# Altium PCB SuperFin Baseboard #1.PcbDoc
Units mm, origin at the board's own origin, x right, y up, seen from the top; angles counter-clockwise.
Board outline 135 x 84 mm, 3 copper layers (Top Layer, Mid-Layer 1, Bottom Layer); 14 components, 0 nets, 572 pads, 0 vias.
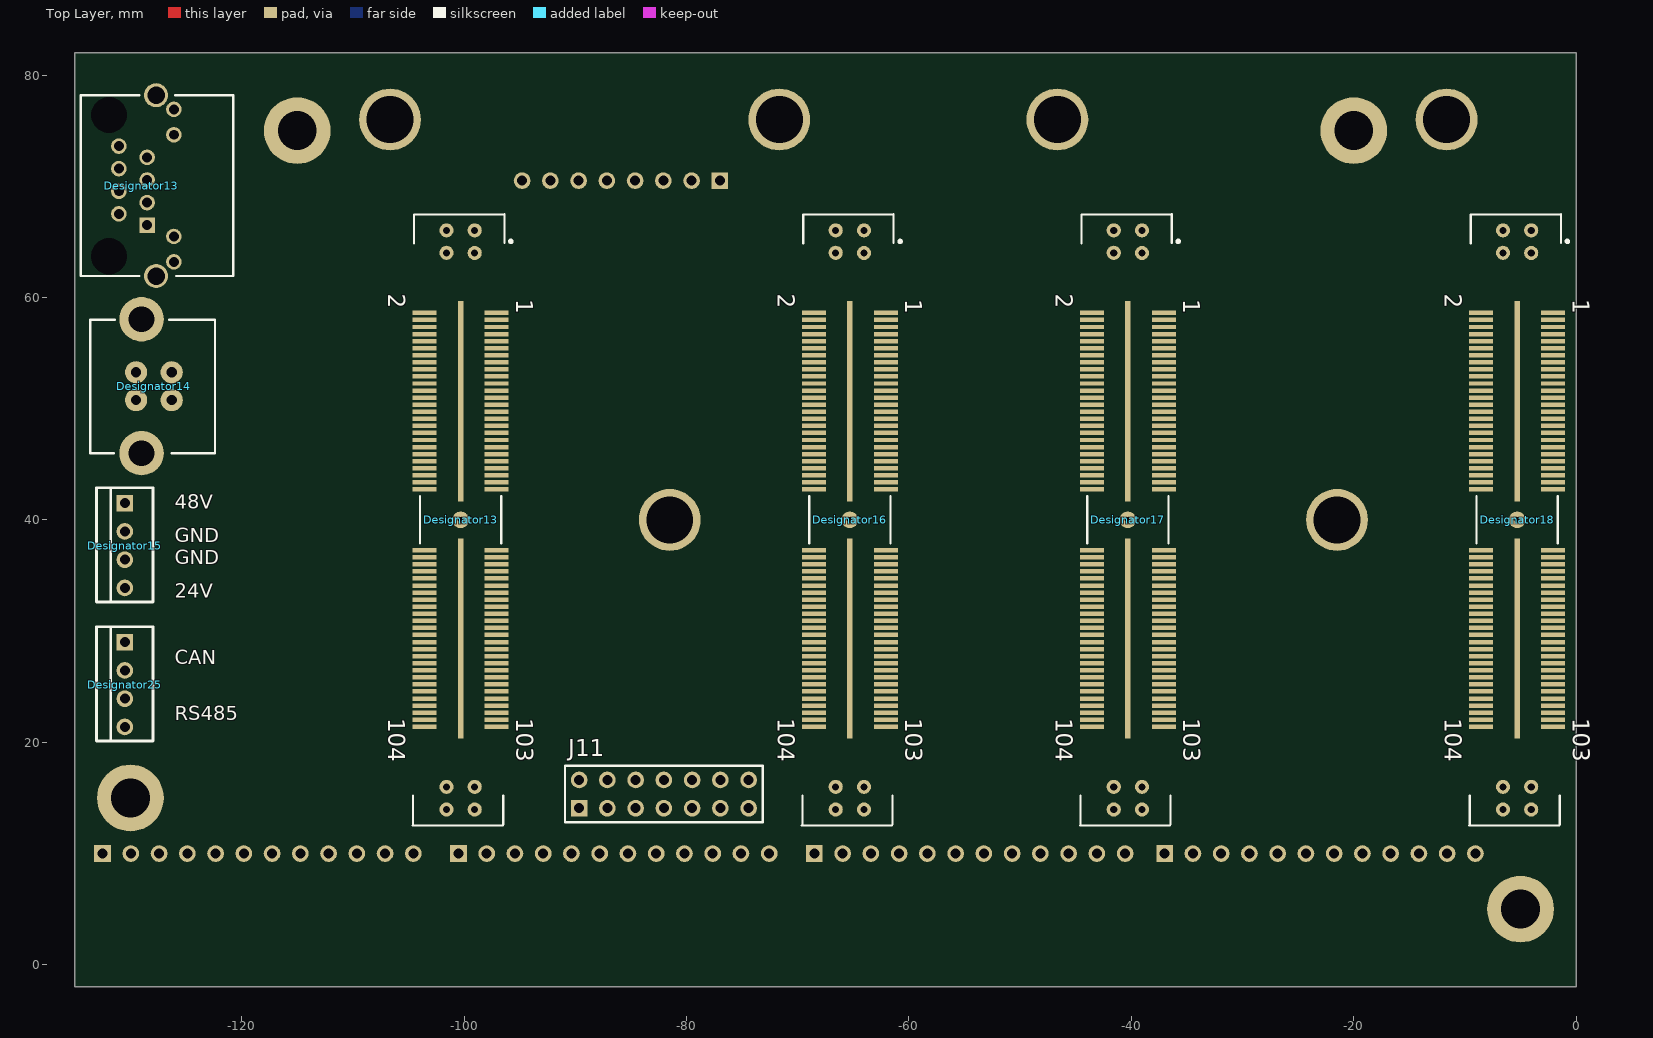
[diagram p0: Top Layer view]
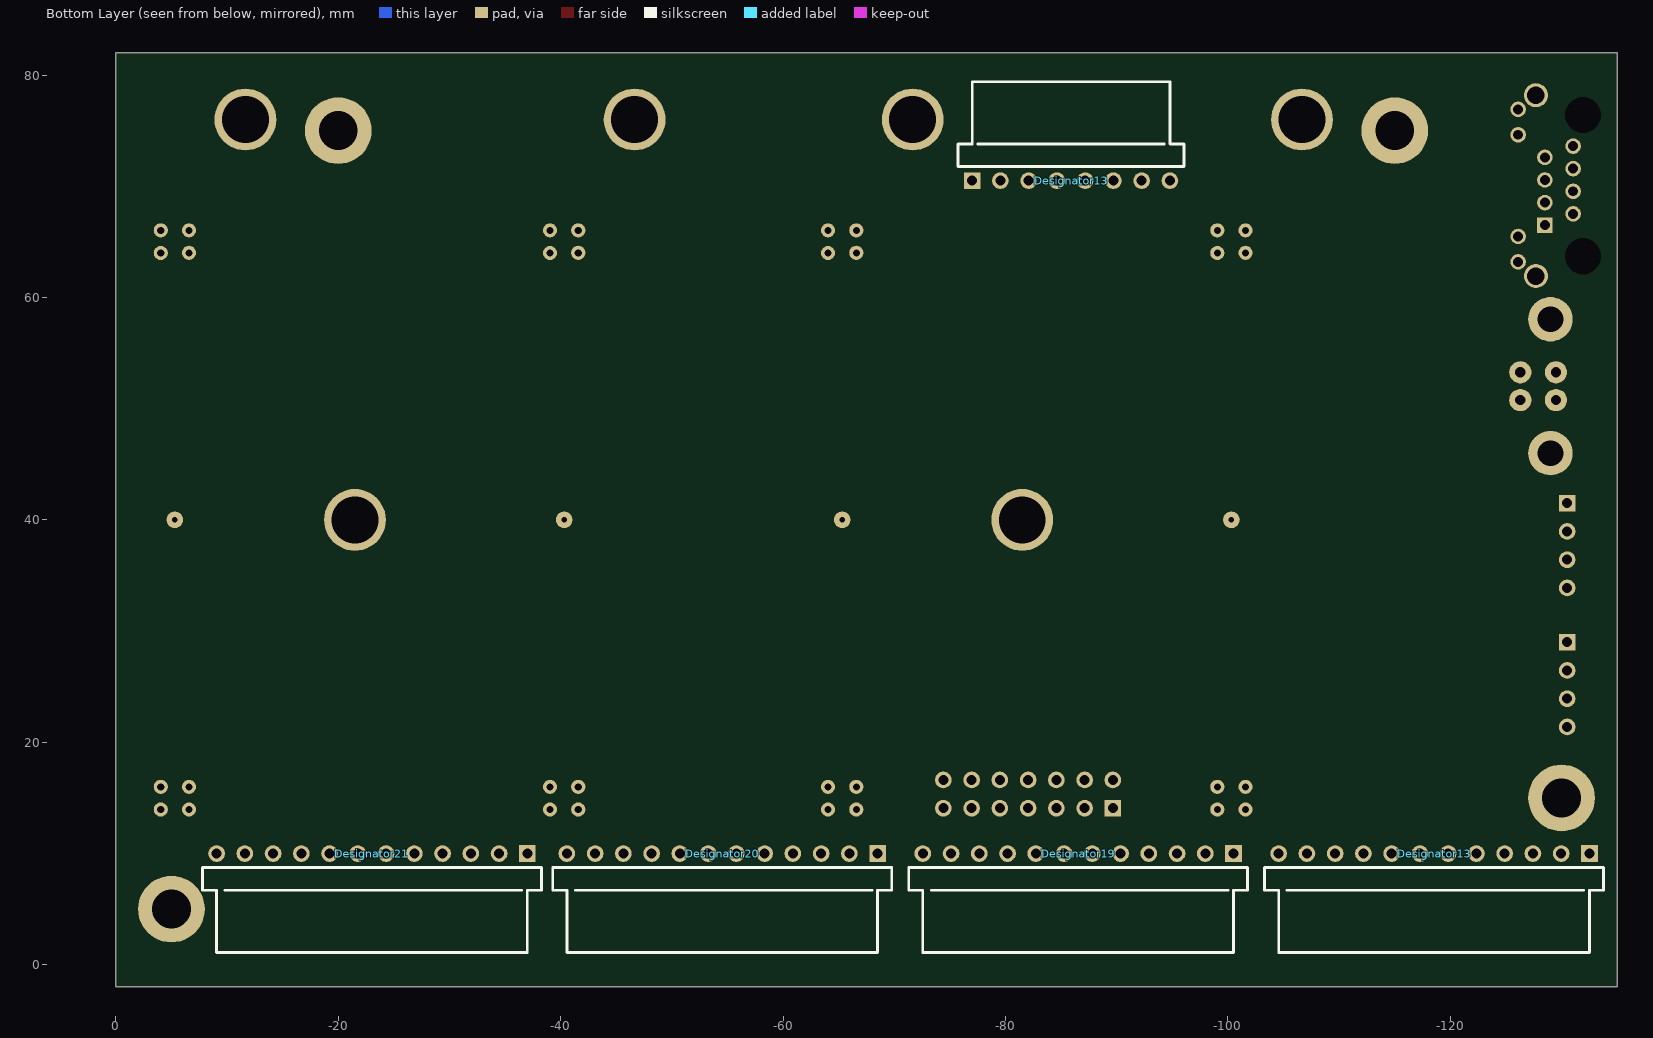
[diagram p1: Bottom Layer view, seen from below]

## Layer stack, top to bottom
Top Layer: signal copper 0.0356
Dielectric: dielectric 0.32, FR-4, Dk 4.8
Mid-Layer 1: signal copper 0.0356
Dielectric: dielectric 0.32, FR-4, Dk 4.8
Bottom Layer: signal copper 0.0356

## Board outline
-135,-2 0,-2 0,82 -135,82

## Design rules (kind name [scope] priority, off if disabled: settings)
Clearance [All] p1: gap=0.254
PolygonConnect [All] p1: connectstyle=Relief reliefconductorwidth=0.254 reliefentries=4 polygonreliefangle="90 Angle"
RoutingVias [All] p1: holewidth=0.711 width=1.27 viastyle="Through Hole" minholewidth=0.711 minwidth=1.27 maxholewidth=0.711 maxwidth=1.27
SilkscreenOverComponentPads [All] p1: minsilkscreentomaskgap=0.254
SolderMaskExpansion [All] p1: expansion=0.102
Width [All] p1: maxlimit=0.254 minlimit=0.254 preferedwidth=0.254
27 further rules are at their usual default settings.

## Components (designator, comment, footprint, x,y, rotation, side; value= is the part's Value field where it differs from the comment)
Designator13 "Comment" "HDR 1x12 RT for IDC" -132.5,10 r0 bottom
Designator13 "Comment" "RJ45, VERT MOUNT, NO MAGNETICS" -128.5,66.5 r270 top
Designator13 "Comment" "QFS SMD PWR PINS - 104 pins" -100.31,40 r270 top
Designator13 "Comment" "HDR1X8 RT for IDC" -77,70.5 r180 bottom
Designator14 "Comment" "USB Vertical PCB" -129,46 r270 top
Designator15 "Comment" "HDR1X4 for IDC" -130.5,41.5 r270 top
Designator16 "Comment" "QFS SMD PWR PINS - 104 pins" -65.31,40 r270 top
Designator17 "Comment" "QFS SMD PWR PINS - 104 pins" -40.31,40 r270 top
Designator18 "Comment" "QFS SMD PWR PINS - 104 pins" -5.31,40 r270 top
Designator19 "Comment" "HDR 1x12 RT for IDC" -100.5,10 r0 bottom
Designator20 "Comment" "HDR 1x12 RT for IDC" -68.5,10 r0 bottom
Designator21 "Comment" "HDR 1x12 RT for IDC" -37,10 r0 bottom
Designator25 "Comment" "HDR1X4 for IDC" -130.5,29 r270 top
J11 "Comment" HDR2X7 -89.65,14.075 r0 top

## Footprints (in the part's own frame and the unit in brackets; to place one, negate y for a bottom-side part, rotate by r counter-clockwise, add the part's x,y. Pads: shape width x height; smd on the part's side, far side on the other; paste and mask are expansions set on the pad)
"HDR1X4 for IDC" [mm] "Connector; Header; 4 Position"
  rect 1.5x1.5 hole 0.9: 1(0,0)
  round 1.5 hole 0.9: 2(2.54,0) 3(5.08,0) 4(7.62,0)
  silkscreen extent -1.4,-2.54 8.89,2.54
"HDR1X8 RT for IDC" [mm] "Connector; Header; 8 Position, RT Angle"
  rect 1.5x1.5 hole 0.9: 1(0,0)
  round 1.5 hole 0.9: 2(2.54,0) 3(5.08,0) 4(7.62,0) 5(10.16,0) 6(12.7,0) 7(15.24,0) 8(17.78,0)
  silkscreen extent -1.27,1.27 19.05,8.89
HDR2X7 [mm] "Connector; Header; 7x2 Position"
  rect 1.5x1.5 hole 0.9: 1(0,0)
  round 1.5 hole 0.9: 2(0,2.54) 3(2.54,0) 4(2.54,2.54) 5(5.08,0) 6(5.08,2.54) 7(7.62,0) 8(7.62,2.54) 9(10.16,0) 10(10.16,2.54) 11(12.7,0) 12(12.7,2.54) 13(15.24,0) 14(15.24,2.54)
  silkscreen extent -1.27,-1.27 16.51,3.81
"HDR 1x12 RT for IDC" [mm]
  rect 1.5x1.5 hole 0.9: 1(0,0)
  round 1.5 hole 0.9: 2(2.54,0) 3(5.08,0) 4(7.62,0) 5(10.16,0) 6(12.7,0) 7(15.24,0) 8(17.78,0) 9(20.32,0) 10(22.86,0) 11(25.4,0) 12(27.94,0)
  silkscreen extent -1.27,1.27 29.21,8.89
"QFS SMD PWR PINS - 104 pins" [mm] "52 pos (104pin) + 8 pwr pins"
  rect 0.4x2.15 smd: 1(-18.612,3.24) 2(-18.612,-3.24) 3(-17.977,3.24) 4(-17.977,-3.24) 5(-17.342,3.24) 6(-17.342,-3.24) 7(-16.707,3.24) 8(-16.707,-3.24) 9(-16.072,3.24) 10(-16.072,-3.24) 11(-15.437,3.24) 12(-15.437,-3.24) 13(-14.802,3.24) 14(-14.802,-3.24) 15(-14.167,3.24) 16(-14.167,-3.24) 17(-13.532,3.24) 18(-13.532,-3.24) 19(-12.897,3.24) 20(-12.897,-3.24) 21(-12.262,3.24) 22(-12.262,-3.24) 23(-11.627,3.24) 24(-11.627,-3.24) 25(-10.992,3.24) 26(-10.992,-3.24) 27(-10.357,3.24) 28(-10.357,-3.24) 29(-9.722,3.24) 30(-9.722,-3.24) 31(-9.087,3.24) 32(-9.087,-3.24) 33(-8.452,3.24) 34(-8.452,-3.24) 35(-7.817,3.24) 36(-7.817,-3.24) 37(-7.182,3.24) 38(-7.182,-3.24) 39(-6.547,3.24) 40(-6.547,-3.24) 41(-5.912,3.24) 42(-5.912,-3.24) 43(-5.277,3.24) 44(-5.277,-3.24) 45(-4.642,3.24) 46(-4.642,-3.24) 47(-4.007,3.24) 48(-4.007,-3.24) 49(-3.372,3.24) 50(-3.372,-3.24) 51(-2.737,3.24) 52(-2.737,-3.24) 53(2.728,3.24) 54(2.728,-3.24) 55(3.363,3.24) 56(3.363,-3.24) 57(3.998,3.24) 58(3.998,-3.24) 59(4.633,3.24) 60(4.633,-3.24) 61(5.268,3.24) 62(5.268,-3.24) 63(5.903,3.24) 64(5.903,-3.24) 65(6.538,3.24) 66(6.538,-3.24) 67(7.173,3.24) 68(7.173,-3.24) 69(7.808,3.24) 70(7.808,-3.24) 71(8.443,3.24) 72(8.443,-3.24) 73(9.078,3.24) 74(9.078,-3.24) 75(9.713,3.24) 76(9.713,-3.24) 77(10.348,3.24) 78(10.348,-3.24) 79(10.983,3.24) 80(10.983,-3.24) 81(11.618,3.24) 82(11.618,-3.24) 83(12.253,3.24) 84(12.253,-3.24) 85(12.888,3.24) 86(12.888,-3.24) 87(13.523,3.24) 88(13.523,-3.24) 89(14.158,3.24) 90(14.158,-3.24) 91(14.793,3.24) 92(14.793,-3.24) 93(15.428,3.24) 94(15.428,-3.24) 95(16.063,3.24) 96(16.063,-3.24) 97(16.698,3.24) 98(16.698,-3.24) 99(17.333,3.24) 100(17.333,-3.24) 101(17.968,3.24) 102(17.968,-3.24) 103(18.603,3.24) 104(18.603,-3.24)
  rect 18x0.5 smd: 105(-10.672,0) 106(10.668,0)
  round 1.27 hole 0.635 mask+0: PC01(-26.035,1.27) PC02(-26.035,-1.27) PC03(-24.003,1.27) PC04(-24.016,-1.27) PC05(24.003,1.27) PC06(24.003,-1.27) PC07(26.035,1.27) PC08(26.035,-1.27)
  silkscreen extent -27.49,-4.32 27.48,4.65
"RJ45, VERT MOUNT, NO MAGNETICS" [mil] "Amphenol p/n RJHSE-3381"
  rect 55x55 hole 35: 1(0,0)
  round 55 hole 35: 2(-40,-100) 3(-80,0) 4(-120,-100) 5(-160,0) 6(-200,-100) 7(-240,0) 8(-280,-100) 9(130,95) 10(40,95) 11(-320,95) 12(-410,95)
  round 85 hole 62: 13(180,32) 14(-460,32)
  round 116.14 hole 127.95 unplated: MH1(110,-135) MH2(-390,-135)
  silkscreen extent -460,-235 180,305
"USB Vertical PCB" [mm] "EDAC USB typeB p/n 690-004-260-023"
  round 2 hole 0.92: 1(-4.77,2.71) 2(-7.27,2.71) 3(-7.27,-0.49) 4(-4.77,-0.49)
  round 4 hole 2.3: 5(-12.04,0) 6(0,0)
  silkscreen extent -12,-4.6 0,6.6

## Free pads (board coordinates)
  round 5.56 hole 4.22: 0(-106.65,76)
  round 1.5 hole 0.5 unplated: 0(-100.31,40) 0(-65.31,40) 0(-40.31,40) 0(-5.31,40)
  round 5.56 hole 4.22 unplated: 0(-81.5,40) 0(-71.65,76) 0(-46.65,76) 0(-21.5,40) 0(-11.65,76)
  round 4.22 hole 4.22 unplated: 0(-21.5,40) 1(-81.5,40)
  round 6 hole 3.5 unplated: 0(-20,75) 1(-5,5) 2(-130,15) 3(-115,75)

## Nets (pads, with @x,y where several pads share a name; then routed paths per layer and width w, separated by ;. In a path a pad name is that pad's centre, name@x,y a point inside that pad or via, vN(x,y) a via of type N, cw(c..) or ccw(c..) an arc to the next point about the centre after c; other vN are vias at no path point)
pads on no net: Designator13.1 Designator13.2 Designator13.3 Designator13.4 Designator13.5 Designator13.6 Designator13.7 Designator13.8 Designator13.9 Designator13.10 Designator13.11 Designator13.12 Designator13.13 Designator13.14 Designator13.15 Designator13.16 Designator13.17 Designator13.18 Designator13.19 Designator13.20 Designator13.21 Designator13.22 Designator13.23 Designator13.24 Designator13.25 Designator13.26 Designator13.27 Designator13.28 Designator13.29 Designator13.30 Designator13.31 Designator13.32 Designator13.33 Designator13.34 Designator13.35 Designator13.36 Designator13.37 Designator13.38 Designator13.39 Designator13.40 Designator13.41 Designator13.42 Designator13.43 Designator13.44 Designator13.45 Designator13.46 Designator13.47 Designator13.48 Designator13.49 Designator13.50 Designator13.51 Designator13.52 Designator13.53 Designator13.54 Designator13.55 Designator13.56 Designator13.57 Designator13.58 Designator13.59 Designator13.60 Designator13.61 Designator13.62 Designator13.63 Designator13.64 Designator13.65 Designator13.66 Designator13.67 Designator13.68 Designator13.69 Designator13.70 Designator13.71 Designator13.72 Designator13.73 Designator13.74 Designator13.75 Designator13.76 Designator13.77 Designator13.78 Designator13.79 Designator13.80 Designator13.81 Designator13.82 Designator13.83 Designator13.84 Designator13.85 Designator13.86 Designator13.87 Designator13.88 Designator13.89 Designator13.90 Designator13.91 Designator13.92 Designator13.93 Designator13.94 Designator13.95 Designator13.96 Designator13.97 Designator13.98 Designator13.99 Designator13.100 Designator13.101 Designator13.102 Designator13.103 Designator13.104 Designator13.105 Designator13.106 Designator13.MH1 Designator13.MH2 Designator13.PC01 Designator13.PC02 Designator13.PC03 Designator13.PC04 Designator13.PC05 Designator13.PC06 Designator13.PC07 Designator13.PC08 Designator14.1 Designator14.2 Designator14.3 Designator14.4 Designator14.5 Designator14.6 Designator15.1 Designator15.2 Designator15.3 Designator15.4 Designator16.1 Designator16.2 Designator16.3 Designator16.4 Designator16.5 Designator16.6 Designator16.7 Designator16.8 Designator16.9 Designator16.10 Designator16.11 Designator16.12 Designator16.13 Designator16.14 Designator16.15 Designator16.16 Designator16.17 Designator16.18 Designator16.19 Designator16.20 Designator16.21 Designator16.22 Designator16.23 Designator16.24 Designator16.25 Designator16.26 Designator16.27 Designator16.28 Designator16.29 Designator16.30 Designator16.31 Designator16.32 Designator16.33 Designator16.34 Designator16.35 Designator16.36 Designator16.37 Designator16.38 Designator16.39 Designator16.40 Designator16.41 Designator16.42 Designator16.43 Designator16.44 Designator16.45 Designator16.46 Designator16.47 Designator16.48 Designator16.49 Designator16.50 Designator16.51 Designator16.52 Designator16.53 Designator16.54 Designator16.55 Designator16.56 Designator16.57 Designator16.58 Designator16.59 Designator16.60 Designator16.61 Designator16.62 Designator16.63 Designator16.64 Designator16.65 Designator16.66 Designator16.67 Designator16.68 Designator16.69 Designator16.70 Designator16.71 Designator16.72 Designator16.73 Designator16.74 Designator16.75 Designator16.76 Designator16.77 Designator16.78 Designator16.79 Designator16.80 Designator16.81 Designator16.82 Designator16.83 Designator16.84 Designator16.85 Designator16.86 Designator16.87 Designator16.88 Designator16.89 Designator16.90 Designator16.91 Designator16.92 Designator16.93 Designator16.94 Designator16.95 Designator16.96 Designator16.97 Designator16.98 Designator16.99 Designator16.100 Designator16.101 Designator16.102 Designator16.103 Designator16.104 Designator16.105 Designator16.106 Designator16.PC01 Designator16.PC02 Designator16.PC03 Designator16.PC04 Designator16.PC05 Designator16.PC06 Designator16.PC07 Designator16.PC08 Designator17.1 Designator17.2 Designator17.3 Designator17.4 Designator17.5 Designator17.6 Designator17.7 Designator17.8 Designator17.9 Designator17.10 Designator17.11 Designator17.12 Designator17.13 Designator17.14 Designator17.15 Designator17.16 Designator17.17 Designator17.18 Designator17.19 Designator17.20 Designator17.21 Designator17.22 Designator17.23 Designator17.24 Designator17.25 Designator17.26 Designator17.27 Designator17.28 Designator17.29 Designator17.30 Designator17.31 Designator17.32 Designator17.33 Designator17.34 Designator17.35 Designator17.36 Designator17.37 Designator17.38 Designator17.39 Designator17.40 Designator17.41 Designator17.42 Designator17.43 Designator17.44 Designator17.45 Designator17.46 Designator17.47 Designator17.48 Designator17.49 Designator17.50 Designator17.51 Designator17.52 Designator17.53 Designator17.54 Designator17.55 Designator17.56 Designator17.57 Designator17.58 Designator17.59 Designator17.60 Designator17.61 Designator17.62 Designator17.63 Designator17.64 Designator17.65 Designator17.66 Designator17.67 Designator17.68 Designator17.69 Designator17.70 Designator17.71 Designator17.72 Designator17.73 Designator17.74 Designator17.75 Designator17.76 Designator17.77 Designator17.78 Designator17.79 Designator17.80 Designator17.81 Designator17.82 Designator17.83 Designator17.84 Designator17.85 Designator17.86 Designator17.87 Designator17.88 Designator17.89 Designator17.90 Designator17.91 Designator17.92 Designator17.93 Designator17.94 Designator17.95 Designator17.96 Designator17.97 Designator17.98 Designator17.99 Designator17.100 Designator17.101 Designator17.102 Designator17.103 Designator17.104 Designator17.105 Designator17.106 Designator17.PC01 Designator17.PC02 Designator17.PC03 Designator17.PC04 Designator17.PC05 Designator17.PC06 Designator17.PC07 Designator17.PC08 Designator18.1 Designator18.2 Designator18.3 Designator18.4 Designator18.5 Designator18.6 Designator18.7 Designator18.8 Designator18.9 Designator18.10 Designator18.11 Designator18.12 Designator18.13 Designator18.14 Designator18.15 Designator18.16 Designator18.17 Designator18.18 Designator18.19 Designator18.20 Designator18.21 Designator18.22 Designator18.23 Designator18.24 Designator18.25 Designator18.26 Designator18.27 Designator18.28 Designator18.29 Designator18.30 Designator18.31 Designator18.32 Designator18.33 Designator18.34 Designator18.35 Designator18.36 Designator18.37 Designator18.38 Designator18.39 Designator18.40 Designator18.41 Designator18.42 Designator18.43 Designator18.44 Designator18.45 Designator18.46 Designator18.47 Designator18.48 Designator18.49 Designator18.50 Designator18.51 Designator18.52 Designator18.53 Designator18.54 Designator18.55 Designator18.56 Designator18.57 Designator18.58 Designator18.59 Designator18.60 Designator18.61 Designator18.62 Designator18.63 Designator18.64 Designator18.65 Designator18.66 Designator18.67 Designator18.68 Designator18.69 Designator18.70 Designator18.71 Designator18.72 Designator18.73 Designator18.74 Designator18.75 Designator18.76 Designator18.77 Designator18.78 Designator18.79 Designator18.80 Designator18.81 Designator18.82 Designator18.83 Designator18.84 Designator18.85 Designator18.86 Designator18.87 Designator18.88 Designator18.89 Designator18.90 Designator18.91 Designator18.92 Designator18.93 Designator18.94 Designator18.95 Designator18.96 Designator18.97 Designator18.98 Designator18.99 Designator18.100 Designator18.101 Designator18.102 Designator18.103 Designator18.104 Designator18.105 Designator18.106 Designator18.PC01 Designator18.PC02 Designator18.PC03 Designator18.PC04 Designator18.PC05 Designator18.PC06 Designator18.PC07 Designator18.PC08 Designator19.1 Designator19.2 Designator19.3 Designator19.4 Designator19.5 Designator19.6 Designator19.7 Designator19.8 Designator19.9 Designator19.10 Designator19.11 Designator19.12 Designator20.1 Designator20.2 Designator20.3 Designator20.4 Designator20.5 Designator20.6 Designator20.7 Designator20.8 Designator20.9 Designator20.10 Designator20.11 Designator20.12 Designator21.1 Designator21.2 Designator21.3 Designator21.4 Designator21.5 Designator21.6 Designator21.7 Designator21.8 Designator21.9 Designator21.10 Designator21.11 Designator21.12 Designator25.1 Designator25.2 Designator25.3 Designator25.4 J11.1 J11.2 J11.3 J11.4 J11.5 J11.6 J11.7 J11.8 J11.9 J11.10 J11.11 J11.12 J11.13 J11.14

## Other copper
Top Layer:
  text "FROM BELOW" at 13,65 h1.27
  text "NOTES:" at 13,-11 h1.27
  text "1) SUPERFIN MODULE ON BOTTOM OF BOARD" at 18,-14 h1.27
  text "2) MAX COMPONET HEIGHT TOP SIDE = 10 mm" at 18,-17 h1.27
  text "(EXCEPT ON FAR LEFT)" at 21,-19 h1.27
  text "3) MAX COMPONENT HIGHT BOTTOM SIDE = 7 mm" at 18,-22 h1.27
  text "(for possibility of placing SuperFin remote from baseboard)" at 21,-24 h1.27
  text "SuperFin Baseboard Mechanical Layout" at -165.4,-27.9 h5
  text "Flipped Samtec 180deg" at -109.1,-35 h2
  text "Rev B" at -164.8,-37.2 h5
  text "Moved Samtec 0.81mm to left" at -109.7,-39.15 h2
  text "Moved holes for brackets" at -110.3,-42.7 h2
  text "Moved center standoffs by 1mm" at -110.875,-46.45 h2
  text "11/15/2010" at -167.6,-46.8 h5

## Silkscreen, mask and mechanical layers (free items; w line width, h text height)
Top Overlay:
  text "48V" at -126,41 h1.27
  text "GND" at -126,38 h1.27
  text "GND" at -126,36 h1.27
  text "24V" at -126,33 h1.27
  text "CAN" at -126,27 h1.27
  text "RS485" at -126,22 h1.27
Mechanical 3:
  rectangle: -101.11,0 -99.51,80
  rectangle: -66.11,0 -64.51,80
  rectangle: -41.11,0 -39.51,80
  rectangle: -6.11,0 -4.51,80
Mechanical 4:
  rectangle: -95.5,0 -60.5,80
  rectangle: -35.5,0 -0.5,80
Mechanical 13:
  region: -3,77.1 -3,79.5 -6.5,79.5 -6.5,77.1
  region: -14.5,79.6 -14.5,72.4 -6.5,72.4 -6.5,70.3 -3,70.3 -3,79.6
  region: -38,77.1 -38,79.5 -41.5,79.5 -41.5,77.1
  region: -49.5,79.6 -49.5,72.4 -41.5,72.4 -41.5,70.3 -38,70.3 -38,79.6
  region: -63,77.1 -63,79.5 -66.5,79.5 -66.5,77.1
  region: -74.5,79.6 -74.5,72.4 -66.5,72.4 -66.5,70.3 -63,70.3 -63,79.6
  region: -109.5,79.6 -109.5,72.4 -101.5,72.4 -101.5,70.3 -98,70.3 -98,79.6
  region: -98,77.1 -98,79.5 -101.5,79.5 -101.5,77.1
  lines w0.254: -120,0 -120,80 ; -95,0 -95,80 ; -60,0 -60,80 ; -35,0 -35,80
  lines w0.635: -135,-2 -135,82 0,82 0,-2 -135,-2

## Dimensions
-135,-2 to 0,-2 on Mechanical 13
-135,-2 to -135,82 on Mechanical 13
-135,82 to -120,80 on Mechanical 13
-120,81 to -95,80 on Mechanical 13
-94.928,91 to -59.928,91 on Mechanical 13
-60,80 to -35,80 on Mechanical 13
-35,80.381 to 0,82 on Mechanical 13
0,82 to -11.65,76 on Mechanical 13
0,82 to -11.65,76 on Mechanical 13
0,-2 to -5,40 on Mechanical 13
0,-2 to -21.5,40 on Mechanical 13
-21.5,40 to -81.5,40 on Mechanical 13
-137,68 to -149,85 on Mechanical 13
-138,53 to -157,49 on Top Layer
-138,37 to -144,33 on Top Layer
-123,-2 to -139,-10 on Top Layer
-88,83 to -82,100 on Top Layer
-7,71 to 5,68 on Top Layer
2,51 to 10,56 on Top Layer
-42,82 to -23,101 on Top Layer

## Text inside footprints (layer, text, board x,y; h text height)
Designator13: Top Overlay "1" at -95.31,59.832 h1.52 r270; Top Overlay "2" at -106.81,60.332 h1.52 r270; Top Overlay "104" at -106.81,22.168 h1.52 r270; Top Overlay "103" at -95.31,22.168 h1.52 r270
Designator16: Top Overlay "103" at -60.31,22.168 h1.52 r270; Top Overlay "104" at -71.81,22.168 h1.52 r270; Top Overlay "2" at -71.81,60.332 h1.52 r270; Top Overlay "1" at -60.31,59.832 h1.52 r270
Designator17: Top Overlay "1" at -35.31,59.832 h1.52 r270; Top Overlay "2" at -46.81,60.332 h1.52 r270; Top Overlay "104" at -46.81,22.168 h1.52 r270; Top Overlay "103" at -35.31,22.168 h1.52 r270
Designator18: Top Overlay "103" at -0.31,22.168 h1.52 r270; Top Overlay "104" at -11.81,22.168 h1.52 r270; Top Overlay "2" at -11.81,60.332 h1.52 r270; Top Overlay "1" at -0.31,59.832 h1.52 r270